# EAGLE board Serial-7-Segment-Shield-Panel-v11 (EAGLE 6.5.0)
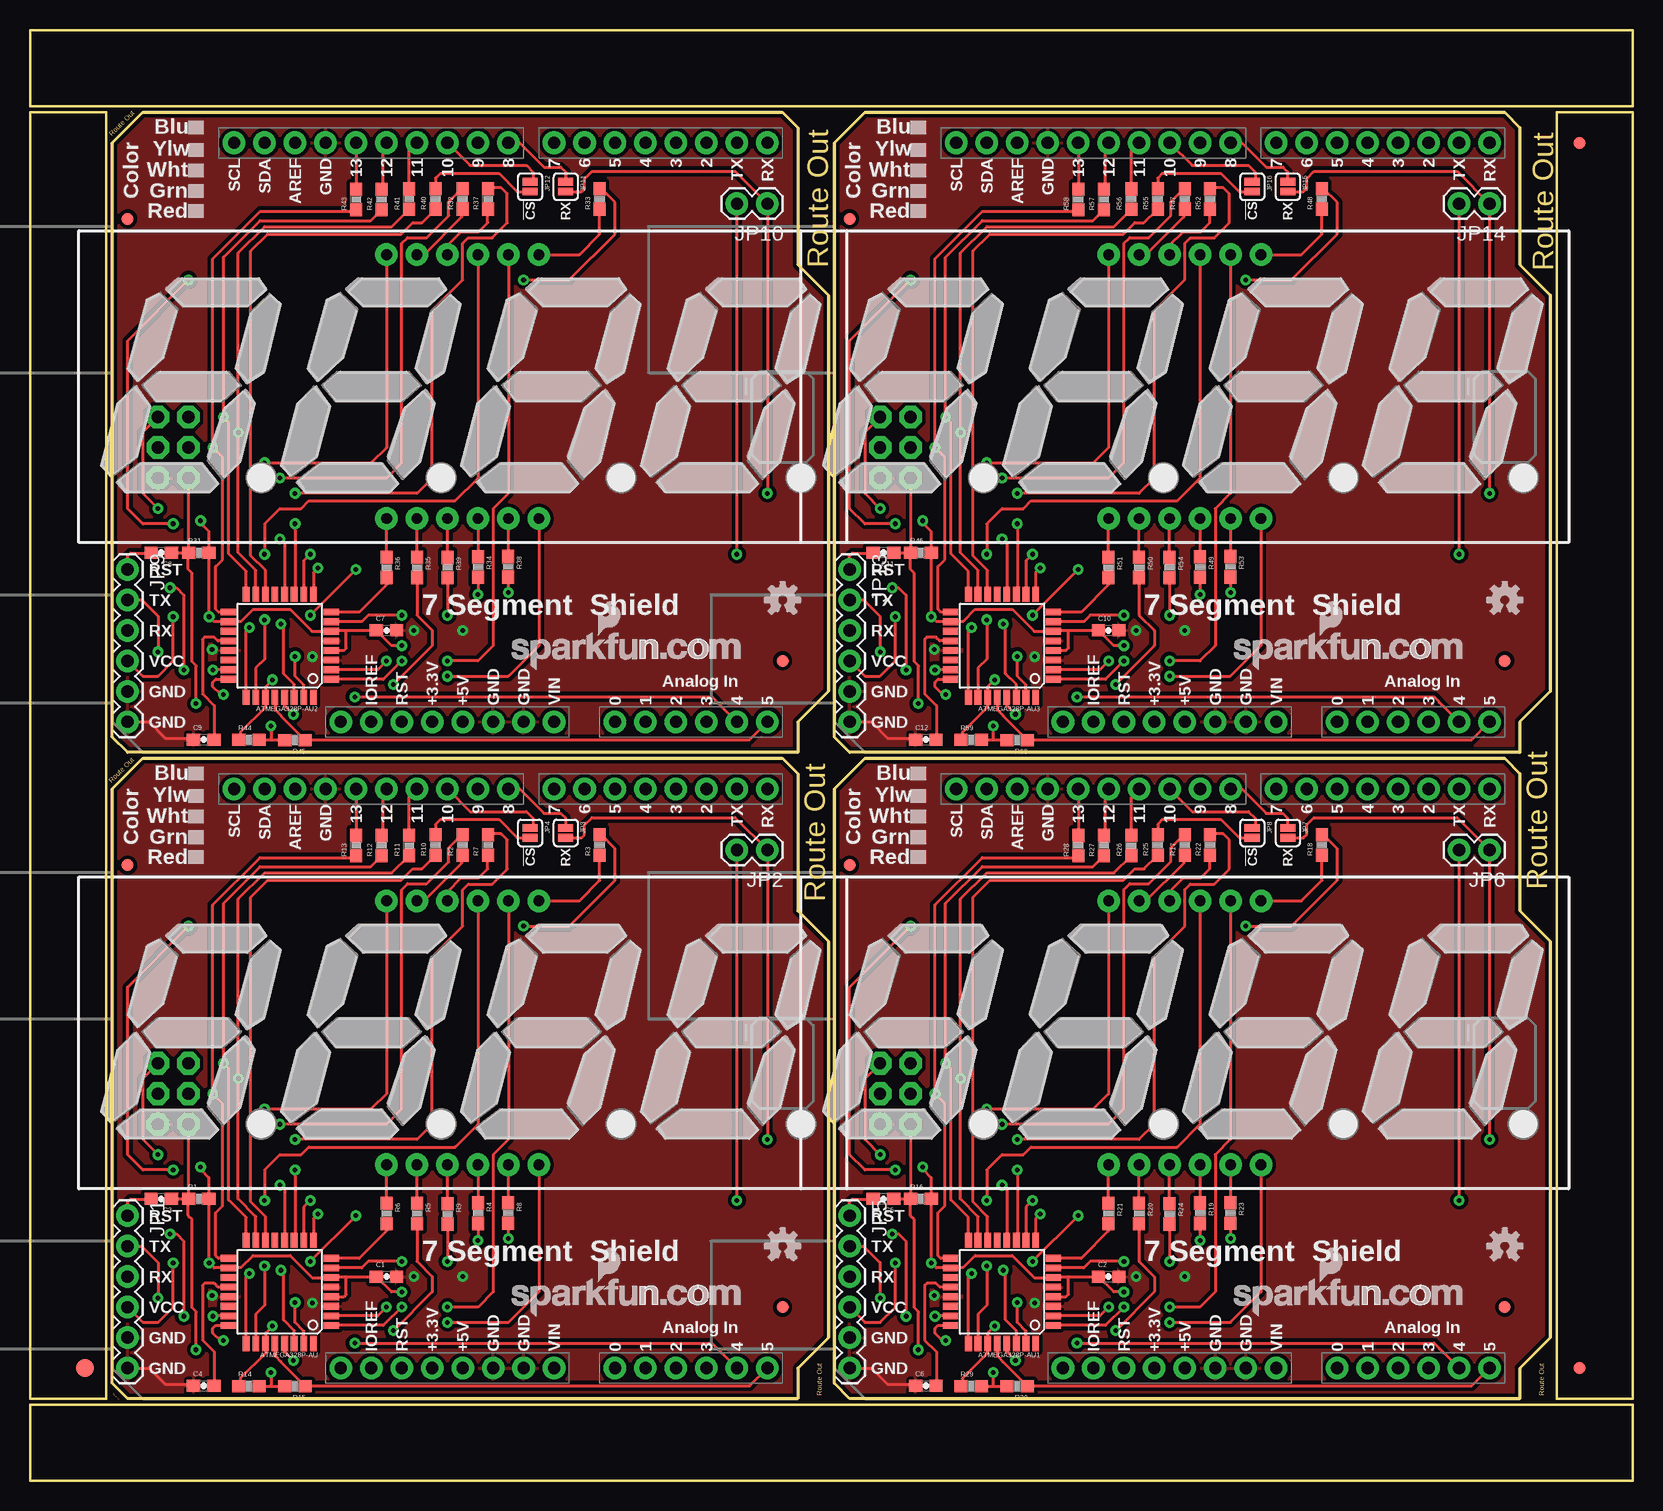
[diagram p0: board, top side]
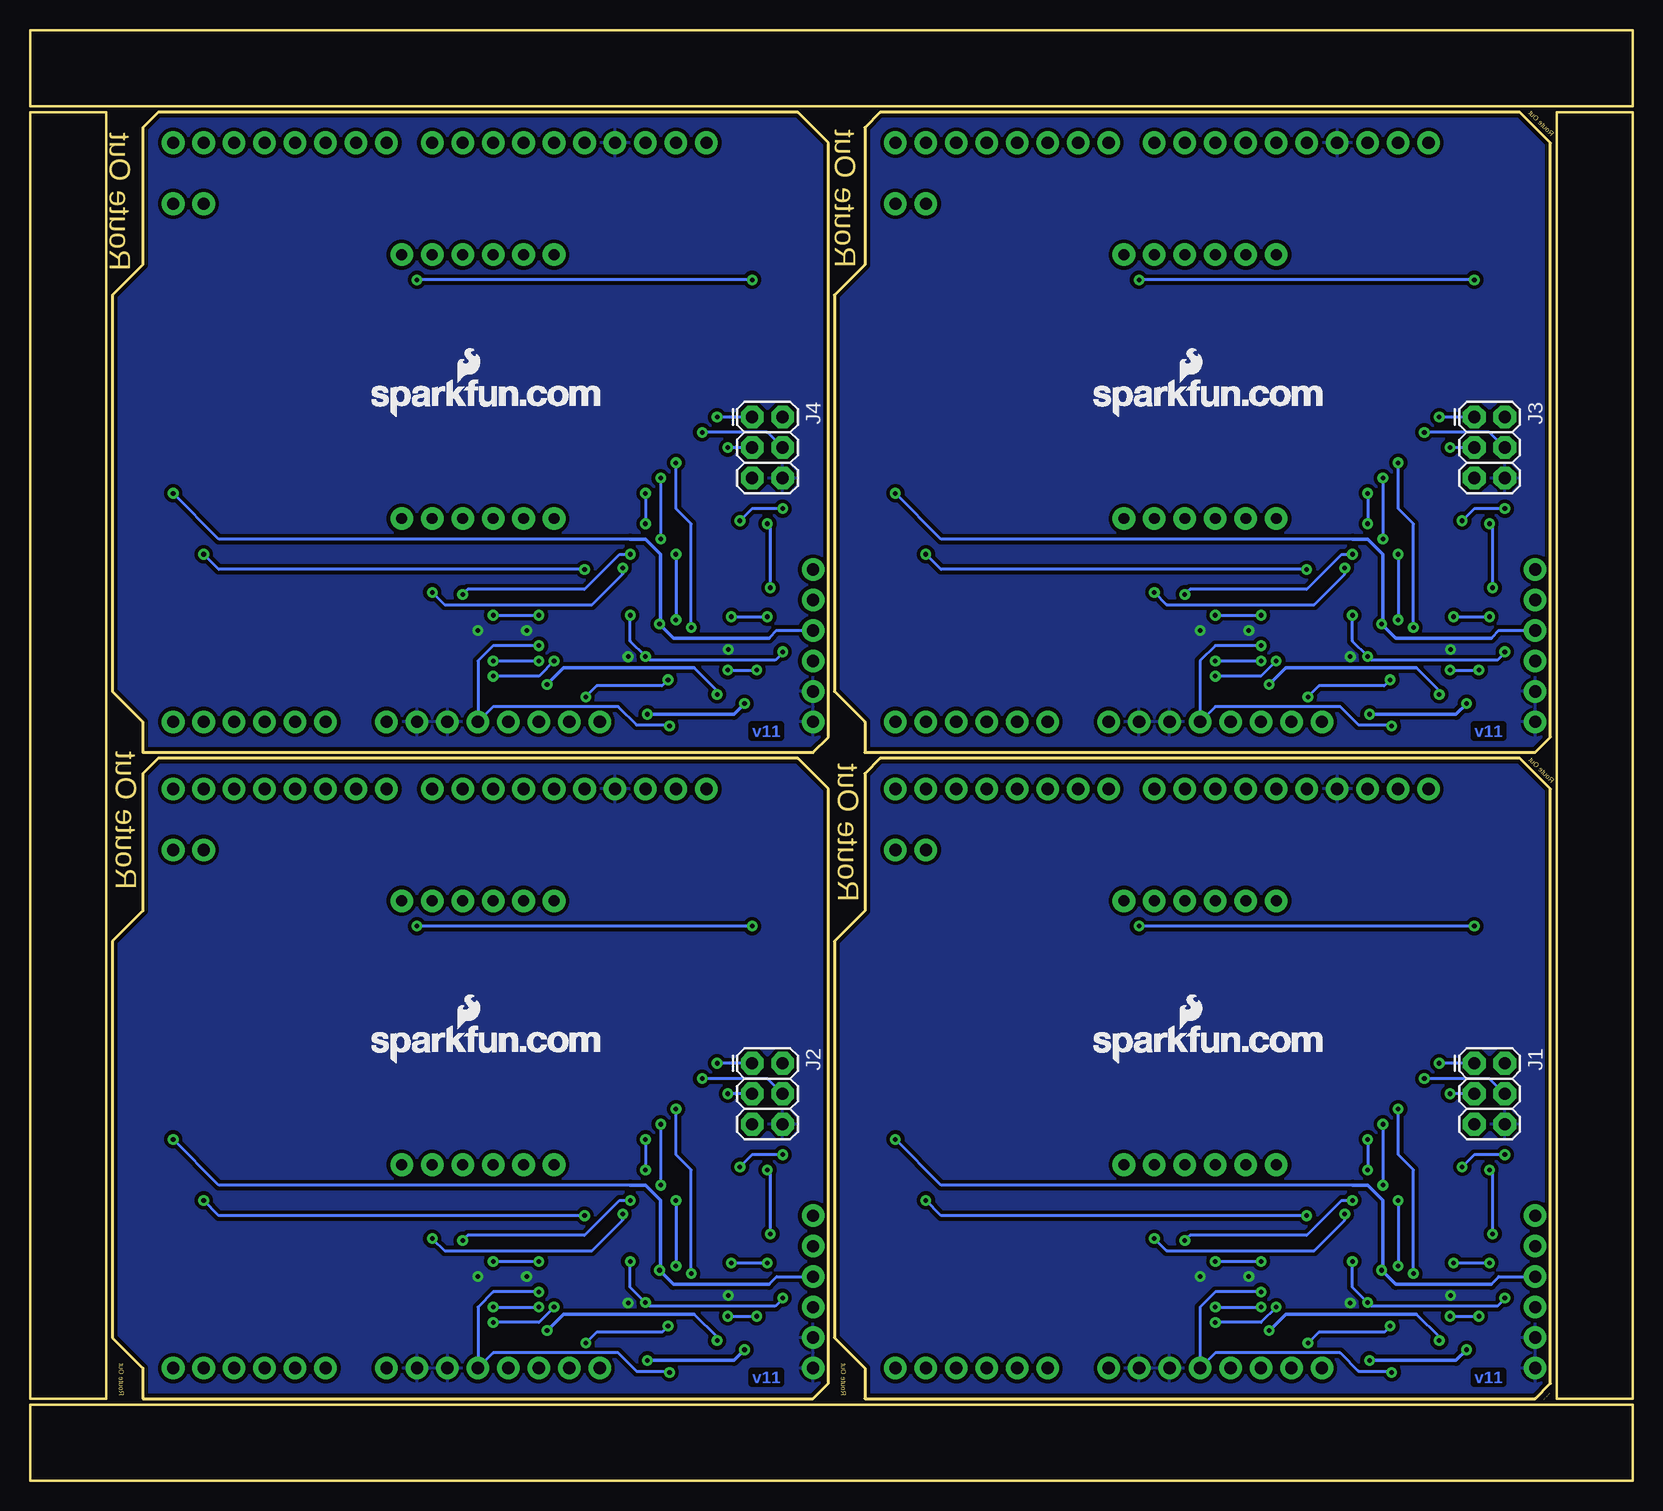
[diagram p1: board, bottom side, seen from below]

Size 133.6 x 120.9 mm. Coordinates in mm from the lower left corner, seen from the top.
Outline: 6.86,8.13 6.86,57.66 9.4,60.2 62.74,60.2 64.01,58.93 64.01,47.5 66.55,44.96 66.55,11.94 64.01,9.4 64.01,6.86 8.13,6.86 6.86,8.13
Outline: 67.06,8.13 67.06,57.66 69.6,60.2 122.94,60.2 124.21,58.93 124.21,47.5 126.75,44.96 126.75,11.94 124.21,9.4 124.21,6.86 68.33,6.86 67.06,8.13
Outline: 6.86,61.98 6.86,111.51 9.4,114.05 62.74,114.05 64.01,112.78 64.01,101.35 66.55,98.81 66.55,65.79 64.01,63.25 64.01,60.71 8.13,60.71 6.86,61.98
Outline: 67.06,61.98 67.06,111.51 69.6,114.05 122.94,114.05 124.21,112.78 124.21,101.35 126.75,98.81 126.75,65.79 124.21,63.25 124.21,60.71 68.33,60.71 67.06,61.98
Outline: 6.35,6.86 6.35,114.05 0,114.05 0,6.86 6.35,6.86
Outline: 0,0 133.6,0 133.6,6.35 0,6.35 0,0
Outline: 133.6,6.86 133.6,114.05 127.25,114.05 127.25,6.86 133.6,6.86
Outline: 133.6,120.9 0,120.9 0,114.55 133.6,114.55 133.6,120.9
Copper layers (1*16): Top 0.035mm / dielectric 1.5mm / Bottom 0.035mm
Design rules "SparkFun-2-layer": minimum track width 7mil, minimum drill 15mil, track to track 8mil, track to pad 8mil, pad to pad 8mil, via to via 8mil, smd to smd 8mil, copper to edge 8mil, drill to drill 8mil, minimum pad ring 12mil, minimum via ring 10mil, stop-mask expansion 4mil, vias tented up to drill 20mil, thermal gap 10mil

## Footprints (pad centres in the part's own frame; a part is rotated, then mirrored left to right if it is on the bottom)
TQFP32-08 = smd 1.27 x 0.559: 1 -4.293,2.8; 2 -4.293,2; 3 -4.293,1.2; 4 -4.293,0.4; 5 -4.293,-0.4; 6 -4.293,-1.2; 7 -4.293,-2; 8 -4.293,-2.8; 17 4.293,-2.8; 18 4.293,-2; 19 4.293,-1.2; 20 4.293,-0.4; 21 4.293,0.4; 22 4.293,1.2; 23 4.293,2; 24 4.293,2.8 | smd 0.559 x 1.27: 9 -2.8,-4.293; 10 -2,-4.293; 11 -1.2,-4.293; 12 -0.4,-4.293; 13 0.4,-4.293; 14 1.2,-4.293; 15 2,-4.293; 16 2.8,-4.293; 25 2.8,4.293; 26 2,4.293; 27 1.2,4.293; 28 0.4,4.293; 29 -0.4,4.293; 30 -1.2,4.293; 31 -2,4.293; 32 -2.8,4.293
0603-CAP = smd 1.1 x 1: 1 -0.85,0; 2 0.85,0
FIDUCIAL-1.5X3 = smd 1.5 x 1.5: 1 0,0
FIDUCIAL-1X2 = smd 1 x 1: 1 0,0
2X3 = drill 1.016 pad 1.88 octagon: 1 0,0; 2 0,2.54; 3 2.54,0; 4 2.54,2.54; 5 5.08,0; 6 5.08,2.54
1X06 = drill 1.016 pad 1.88: 1 0,0; 2 2.54,0; 3 5.08,0; 4 7.62,0; 5 10.16,0; 6 12.7,0
1X02 = drill 1.016 pad 1.88: 1 0,0; 2 2.54,0
SJ_2S = smd 0.635 x 1.27: 1 -0.412,0; 2 0.412,0
0603-RES = smd 1.1 x 1: 1 -0.85,0; 2 0.85,0
UNO_R3_SHIELD = drill 1.016 pad 1.88: 3.3V 50.8,26.67; 5V 50.8,29.21; A0 50.8,41.91; A1 50.8,44.45; A2 50.8,46.99; A3 50.8,49.53; A4 50.8,52.07; A5 50.8,54.61; AREF 2.54,15.24; D2 2.54,49.53; D3 2.54,46.99; D4 2.54,44.45; D5 2.54,41.91; D6 2.54,39.37; D7 2.54,36.83; D8 2.54,33.02; D9 2.54,30.48; D10 2.54,27.94; D11 2.54,25.4; D12 2.54,22.86; D13 2.54,20.32; GND@0 50.8,31.75; GND@1 50.8,34.29; GND@2 2.54,17.78; IOREF 50.8,21.59; NC 50.8,19.05; RES 50.8,24.13; RX 2.54,54.61; SCL 2.54,10.16; SDA 2.54,12.7; TX 2.54,52.07; VIN 50.8,36.83
7-SEGMENT-4DIGIT-COUNTER = drill 0.9 pad 1.88: 1 -6.35,-10.998; 2 -3.81,-10.998; 3 -1.27,-10.998; 4 1.27,-10.998; 5 3.81,-10.998; 6 6.35,-10.998; 7 6.35,10.998; 8 3.81,10.998; 9 1.27,10.998; 10 -1.27,10.998; 11 -3.81,10.998; 12 -6.35,10.998

## Placement (x,y rotation side)
ATMEGA328P-AU  ATMEGA328P-AU  [TQFP32-08]  20.83,15.75 180 top
ATMEGA328P-AU1  ATMEGA328P-AU  [TQFP32-08]  81.03,15.75 180 top
ATMEGA328P-AU2  ATMEGA328P-AU  [TQFP32-08]  20.83,69.6 180 top
ATMEGA328P-AU3  ATMEGA328P-AU  [TQFP32-08]  81.03,69.6 180 top
C1  0.1uF  [0603-CAP]  29.72,17.02 0 top
C2  0.1uF  [0603-CAP]  89.92,17.02 0 top
C3  0.1uF  [0603-CAP]  10.95,23.5 180 top
C4  0.1uF  [0603-CAP]  14.48,7.92 0 top
C5  0.1uF  [0603-CAP]  71.15,23.5 180 top
C6  0.1uF  [0603-CAP]  74.68,7.92 0 top
C7  0.1uF  [0603-CAP]  29.72,70.87 0 top
C8  0.1uF  [0603-CAP]  10.95,77.34 180 top
C9  0.1uF  [0603-CAP]  14.48,61.77 0 top
C10  0.1uF  [0603-CAP]  89.92,70.87 0 top
C11  0.1uF  [0603-CAP]  71.15,77.34 180 top
C12  0.1uF  [0603-CAP]  74.68,61.77 0 top
E$1  [FIDUCIAL-1.5X3]  4.57,9.4 0 top
E$4  [FIDUCIAL-1X2]  129.16,9.4 0 top
E$5  [FIDUCIAL-1X2]  129.16,111.51 180 top
FID1  FIDUCIAL1X2  [FIDUCIAL-1X2]  62.74,14.48 0 top
FID2  FIDUCIAL1X2  [FIDUCIAL-1X2]  8.13,51.31 0 top
FID3  FIDUCIAL1X2  [FIDUCIAL-1X2]  122.94,14.48 0 top
FID4  FIDUCIAL1X2  [FIDUCIAL-1X2]  68.33,51.31 0 top
FID5  FIDUCIAL1X2  [FIDUCIAL-1X2]  62.74,68.33 0 top
FID6  FIDUCIAL1X2  [FIDUCIAL-1X2]  8.13,105.16 0 top
FID7  FIDUCIAL1X2  [FIDUCIAL-1X2]  122.94,68.33 0 top
FID8  FIDUCIAL1X2  [FIDUCIAL-1X2]  68.33,105.16 0 top
J1  AVR_SPI_PRG_6PTH  [2X3]  13.21,34.8 270 bottom
J2  AVR_SPI_PRG_6PTH  [2X3]  73.41,34.8 270 bottom
J3  AVR_SPI_PRG_6PTH  [2X3]  13.21,88.65 270 bottom
J4  AVR_SPI_PRG_6PTH  [2X3]  73.41,88.65 270 bottom
JP1  [1X06]  8.13,22.1 270 top
JP2  [1X02]  61.47,52.58 180 top
JP3  NC  [SJ_2S]  44.65,54 270 top
JP4  NC  [SJ_2S]  41.68,54 270 top
JP5  [1X06]  68.33,22.1 270 top
JP6  [1X02]  121.67,52.58 180 top
JP7  NC  [SJ_2S]  104.85,54 270 top
JP8  NC  [SJ_2S]  101.88,54 270 top
JP9  [1X06]  8.13,75.95 270 top
JP10  [1X02]  61.47,106.43 180 top
JP11  NC  [SJ_2S]  44.65,107.85 270 top
JP12  NC  [SJ_2S]  41.68,107.85 270 top
JP13  [1X06]  68.33,75.95 270 top
JP14  [1X02]  121.67,106.43 180 top
JP15  NC  [SJ_2S]  104.85,107.85 270 top
JP16  NC  [SJ_2S]  101.88,107.85 270 top
LOGO1  LOGO-SFENEW  [SFE-NEW-WEBLOGO]  40.13,13.72 0 top
LOGO2  LOGO-SFENEW  [SFE-NEW-WEBLOGO]  44.96,34.8 0 bottom
LOGO3  LOGO-SFENEW  [SFE-NEW-WEBLOGO]  100.33,13.72 0 top
LOGO4  LOGO-SFENEW  [SFE-NEW-WEBLOGO]  105.16,34.8 0 bottom
LOGO5  LOGO-SFENEW  [SFE-NEW-WEBLOGO]  40.13,67.56 0 top
LOGO6  LOGO-SFENEW  [SFE-NEW-WEBLOGO]  44.96,88.65 0 bottom
LOGO7  LOGO-SFENEW  [SFE-NEW-WEBLOGO]  100.33,67.56 0 top
LOGO8  LOGO-SFENEW  [SFE-NEW-WEBLOGO]  105.16,88.65 0 bottom
R1  10k  [0603-RES]  14.07,23.5 0 top
R2  100  [0603-RES]  36.07,52.98 90 top
R3  100  [0603-RES]  47.5,52.98 90 top
R4  100  [0603-RES]  37.34,22.3 270 top
R5  100  [0603-RES]  32.26,22.28 270 top
R6  100  [0603-RES]  29.72,22.28 270 top
R7  100  [0603-RES]  38.18,52.98 90 top
R8  100  [0603-RES]  39.85,22.33 270 top
R9  100  [0603-RES]  34.8,22.25 270 top
R10  1k  [0603-RES]  33.81,52.98 90 top
R11  1k  [0603-RES]  31.6,52.96 90 top
R12  1k  [0603-RES]  29.31,52.93 90 top
R13  1k  [0603-RES]  27.18,52.93 90 top
R14  10k  [0603-RES]  18.26,7.9 0 top
R15  10k  [0603-RES]  22.1,7.87 180 top
R16  10k  [0603-RES]  74.27,23.5 0 top
R17  100  [0603-RES]  96.27,52.98 90 top
R18  100  [0603-RES]  107.7,52.98 90 top
R19  100  [0603-RES]  97.54,22.3 270 top
R20  100  [0603-RES]  92.46,22.28 270 top
R21  100  [0603-RES]  89.92,22.28 270 top
R22  100  [0603-RES]  98.37,52.98 90 top
R23  100  [0603-RES]  100.05,22.33 270 top
R24  100  [0603-RES]  95,22.25 270 top
R25  1k  [0603-RES]  94.01,52.98 90 top
R26  1k  [0603-RES]  91.8,52.96 90 top
R27  1k  [0603-RES]  89.51,52.93 90 top
R28  1k  [0603-RES]  87.38,52.93 90 top
R29  10k  [0603-RES]  78.46,7.9 0 top
R30  10k  [0603-RES]  82.3,7.87 180 top
R31  10k  [0603-RES]  14.07,77.34 0 top
R32  100  [0603-RES]  36.07,106.83 90 top
R33  100  [0603-RES]  47.5,106.83 90 top
R34  100  [0603-RES]  37.34,76.15 270 top
R35  100  [0603-RES]  32.26,76.12 270 top
R36  100  [0603-RES]  29.72,76.12 270 top
R37  100  [0603-RES]  38.18,106.83 90 top
R38  100  [0603-RES]  39.85,76.17 270 top
R39  100  [0603-RES]  34.8,76.1 270 top
R40  1k  [0603-RES]  33.81,106.83 90 top
R41  1k  [0603-RES]  31.6,106.81 90 top
R42  1k  [0603-RES]  29.31,106.78 90 top
R43  1k  [0603-RES]  27.18,106.78 90 top
R44  10k  [0603-RES]  18.26,61.75 0 top
R45  10k  [0603-RES]  22.1,61.72 180 top
R46  10k  [0603-RES]  74.27,77.34 0 top
R47  100  [0603-RES]  96.27,106.83 90 top
R48  100  [0603-RES]  107.7,106.83 90 top
R49  100  [0603-RES]  97.54,76.15 270 top
R50  100  [0603-RES]  92.46,76.12 270 top
R51  100  [0603-RES]  89.92,76.12 270 top
R52  100  [0603-RES]  98.37,106.83 90 top
R53  100  [0603-RES]  100.05,76.17 270 top
R54  100  [0603-RES]  95,76.1 270 top
R55  1k  [0603-RES]  94.01,106.83 90 top
R56  1k  [0603-RES]  91.8,106.81 90 top
R57  1k  [0603-RES]  89.51,106.78 90 top
R58  1k  [0603-RES]  87.38,106.78 90 top
R59  10k  [0603-RES]  78.46,61.75 0 top
R60  10k  [0603-RES]  82.3,61.72 180 top
U1  ARDUINO_R3_SHIELD  [UNO_R3_SHIELD]  6.86,60.2 270 top
U2  ARDUINO_R3_SHIELD  [UNO_R3_SHIELD]  67.06,60.2 270 top
U3  ARDUINO_R3_SHIELD  [UNO_R3_SHIELD]  6.86,114.05 270 top
U4  ARDUINO_R3_SHIELD  [UNO_R3_SHIELD]  67.06,114.05 270 top
U$1  7-SEGMENT-4DIGIT-COUNTERPTH  [7-SEGMENT-4DIGIT-COUNTER]  36.07,37.34 0 top
U$2  OSHW-LOGOS  [OSHW-LOGO-S]  122.94,19.56 0 top
U$3  7-SEGMENT-4DIGIT-COUNTERPTH  [7-SEGMENT-4DIGIT-COUNTER]  96.27,37.34 0 top
U$4  OSHW-LOGOS  [OSHW-LOGO-S]  62.74,19.56 0 top
U$5  OSHW-LOGOS  [OSHW-LOGO-S]  62.74,73.41 0 top
U$6  7-SEGMENT-4DIGIT-COUNTERPTH  [7-SEGMENT-4DIGIT-COUNTER]  36.07,91.19 0 top
U$7  OSHW-LOGOS  [OSHW-LOGO-S]  122.94,73.41 0 top
U$8  7-SEGMENT-4DIGIT-COUNTERPTH  [7-SEGMENT-4DIGIT-COUNTER]  96.27,91.19 0 top

## Library data of the parts
ATMEGA328P-AU ATMEGA328P-AU1-ATMEGA328P-AU3 C1 C2 C7 C10 R1-R60 = SparkFun
C3-C6 C8 C9 C11 C12 JP3 JP4 JP7 JP8 JP11 JP12 JP15 JP16 = SparkFun-Passives
E$1 = SparkFun-Retired
E$4 E$5 FID1-FID8 LOGO1-LOGO8 U$2 U$4 U$5 U$7 = SparkFun-Aesthetics
J1-J4 JP1 JP2 JP5 JP6 JP9 JP10 JP13 JP14 = SparkFun-Connectors
U1-U4 = SparkFun-Boards
U$1 U$3 U$6 U$8 = SparkFun-Displays

## Nets
!SS: ATMEGA328P-AU.14 R10.1
!SS1: ATMEGA328P-AU1.14 R25.1
!SS2: ATMEGA328P-AU2.14 R40.1
!SS3: ATMEGA328P-AU3.14 R55.1
A: ATMEGA328P-AU.12 R2.2
A1: ATMEGA328P-AU1.12 R17.2
A2: ATMEGA328P-AU2.12 R32.2
A3: ATMEGA328P-AU3.12 R47.2
ADC1: ATMEGA328P-AU1.19
ADC2: ATMEGA328P-AU1.22
ADC3: ATMEGA328P-AU2.19
ADC4: ATMEGA328P-AU2.22
ADC5: ATMEGA328P-AU3.19
ADC6: ATMEGA328P-AU.19
ADC7: ATMEGA328P-AU.22
ADC8: ATMEGA328P-AU3.22
B: ATMEGA328P-AU.23 R3.2
B1: ATMEGA328P-AU1.23 R18.2
B2: ATMEGA328P-AU2.23 R33.2
B3: ATMEGA328P-AU3.23 R48.2
C: ATMEGA328P-AU.10 R4.2
C1: ATMEGA328P-AU1.10 R19.2
C2: ATMEGA328P-AU2.10 R34.2
C3: ATMEGA328P-AU3.10 R49.2
D: ATMEGA328P-AU.24 R5.2
D1: ATMEGA328P-AU1.24 R20.2
D2: ATMEGA328P-AU2.24 R35.2
D3: ATMEGA328P-AU3.24 R50.2
DIG1: ATMEGA328P-AU.25 U$1.12
DIG2: ATMEGA328P-AU.26 U$1.9
DIG3: ATMEGA328P-AU.1 U$1.8
DIG4: ATMEGA328P-AU.2 U$1.6
DIG5: ATMEGA328P-AU1.2 U$3.6
DIG6: ATMEGA328P-AU1.1 U$3.8
DIG7: ATMEGA328P-AU1.26 U$3.9
DIG8: ATMEGA328P-AU1.25 U$3.12
DIG9: ATMEGA328P-AU2.2 U$6.6
DIG10: ATMEGA328P-AU2.1 U$6.8
DIG11: ATMEGA328P-AU2.26 U$6.9
DIG12: ATMEGA328P-AU2.25 U$6.12
DIG13: ATMEGA328P-AU3.2 U$8.6
DIG14: ATMEGA328P-AU3.1 U$8.8
DIG15: ATMEGA328P-AU3.26 U$8.9
DIG16: ATMEGA328P-AU3.25 U$8.12
DP: ATMEGA328P-AU.7 R9.2
DP1: ATMEGA328P-AU1.7 R24.2
DP2: ATMEGA328P-AU2.7 R39.2
DP3: ATMEGA328P-AU3.7 R54.2
E: ATMEGA328P-AU.8 R6.2
E1: ATMEGA328P-AU1.8 R21.2
E2: ATMEGA328P-AU2.8 R36.2
E3: ATMEGA328P-AU3.8 R51.2
F: ATMEGA328P-AU.11 R7.2
F1: ATMEGA328P-AU1.11 R22.2
F2: ATMEGA328P-AU2.11 R37.2
F3: ATMEGA328P-AU3.11 R52.2
G: ATMEGA328P-AU.9 R8.2
G1: ATMEGA328P-AU1.9 R23.2
G2: ATMEGA328P-AU2.9 R38.2
G3: ATMEGA328P-AU3.9 R53.2
GND: ATMEGA328P-AU.3 ATMEGA328P-AU.5 ATMEGA328P-AU.21 C1.2 C4.1 J1.6 JP1.5 JP1.6 U1.GND@0 U1.GND@1 U1.GND@2
GND1: ATMEGA328P-AU1.3 ATMEGA328P-AU1.5 ATMEGA328P-AU1.21 C2.2 C6.1 J2.6 JP5.5 JP5.6 U2.GND@0 U2.GND@1 U2.GND@2
GND2: ATMEGA328P-AU2.3 ATMEGA328P-AU2.5 ATMEGA328P-AU2.21 C7.2 C9.1 J3.6 JP9.5 JP9.6 U3.GND@0 U3.GND@1 U3.GND@2
GND3: ATMEGA328P-AU3.3 ATMEGA328P-AU3.5 ATMEGA328P-AU3.21 C10.2 C12.1 J4.6 JP13.5 JP13.6 U4.GND@0 U4.GND@1 U4.GND@2
MISO: ATMEGA328P-AU.16 J1.1 R12.1
MISO1: ATMEGA328P-AU1.16 J2.1 R27.1
MISO2: ATMEGA328P-AU2.16 J3.1 R42.1
MISO3: ATMEGA328P-AU3.16 J4.1 R57.1
MOSI: ATMEGA328P-AU.15 J1.4 R11.1
MOSI1: ATMEGA328P-AU1.15 J2.4 R26.1
MOSI2: ATMEGA328P-AU2.15 J3.4 R41.1
MOSI3: ATMEGA328P-AU3.15 J4.4 R56.1
N$1: ATMEGA328P-AU.20 C4.2
N$2: R13.2 U1.D13
N$3: R12.2 U1.D12
N$4: R11.2 U1.D11
N$5: JP4.2 R10.2
N$6: JP4.1 U1.D10
N$7: JP3.1 U1.D8
N$8: C5.2 JP5.1
N$9: ATMEGA328P-AU1.20 C6.2
N$10: R17.1 U$3.11
N$11: R2.1 U$1.11
N$12: R3.1 U$1.7
N$13: C3.2 JP1.1
N$14: R4.1 U$1.4
N$15: R5.1 U$1.2
N$16: R6.1 U$1.1
N$17: R7.1 U$1.10
N$18: R8.1 U$1.5
N$19: R9.1 U$1.3
N$20: R18.1 U$3.7
N$21: R19.1 U$3.4
N$22: R20.1 U$3.2
N$23: R21.1 U$3.1
N$24: R22.1 U$3.10
N$25: R23.1 U$3.5
N$26: R24.1 U$3.3
N$27: R28.2 U2.D13
N$28: R27.2 U2.D12
N$29: R26.2 U2.D11
N$30: JP8.2 R25.2
N$31: JP8.1 U2.D10
N$32: JP7.1 U2.D8
N$33: C8.2 JP9.1
N$34: ATMEGA328P-AU2.20 C9.2
N$35: R32.1 U$6.11
N$36: R33.1 U$6.7
N$37: R34.1 U$6.4
N$38: R35.1 U$6.2
N$39: R36.1 U$6.1
N$40: R37.1 U$6.10
N$41: R38.1 U$6.5
N$42: R39.1 U$6.3
N$43: R43.2 U3.D13
N$44: R42.2 U3.D12
N$45: R41.2 U3.D11
N$46: JP12.2 R40.2
N$47: JP12.1 U3.D10
N$48: JP11.1 U3.D8
N$49: C11.2 JP13.1
N$50: ATMEGA328P-AU3.20 C12.2
N$51: R47.1 U$8.11
N$52: R48.1 U$8.7
N$53: R49.1 U$8.4
N$54: R50.1 U$8.2
N$55: R51.1 U$8.1
N$56: R52.1 U$8.10
N$57: R53.1 U$8.5
N$58: R54.1 U$8.3
N$59: R58.2 U4.D13
N$60: R57.2 U4.D12
N$61: R56.2 U4.D11
N$62: JP16.2 R55.2
N$63: JP16.1 U4.D10
N$64: JP15.1 U4.D8
RESET: ATMEGA328P-AU.29 C3.1 J1.5 R1.1
RESET1: ATMEGA328P-AU1.29 C5.1 J2.5 R16.1
RESET2: ATMEGA328P-AU2.29 C8.1 J3.5 R31.1
RESET3: ATMEGA328P-AU3.29 C11.1 J4.5 R46.1
RX: ATMEGA328P-AU.30 JP1.3 JP2.1 JP3.2
RX1: ATMEGA328P-AU1.30 JP5.3 JP6.1 JP7.2
RX2: ATMEGA328P-AU2.30 JP9.3 JP10.1 JP11.2
RX3: ATMEGA328P-AU3.30 JP13.3 JP14.1 JP15.2
SCK: ATMEGA328P-AU.17 J1.3 R13.1
SCK1: ATMEGA328P-AU1.17 J2.3 R28.1
SCK2: ATMEGA328P-AU2.17 J3.3 R43.1
SCK3: ATMEGA328P-AU3.17 J4.3 R58.1
SCL: ATMEGA328P-AU.28 R15.1 U1.A5
SCL1: ATMEGA328P-AU1.28 R30.1 U2.A5
SCL2: ATMEGA328P-AU2.28 R45.1 U3.A5
SCL3: ATMEGA328P-AU3.28 R60.1 U4.A5
SDA: ATMEGA328P-AU.27 R14.1 U1.A4
SDA1: ATMEGA328P-AU1.27 R29.1 U2.A4
SDA2: ATMEGA328P-AU2.27 R44.1 U3.A4
SDA3: ATMEGA328P-AU3.27 R59.1 U4.A4
TX: ATMEGA328P-AU.31 JP1.2 JP2.2
TX1: ATMEGA328P-AU1.31 JP5.2 JP6.2
TX2: ATMEGA328P-AU2.31 JP9.2 JP10.2
TX3: ATMEGA328P-AU3.31 JP13.2 JP14.2
VCC: ATMEGA328P-AU.4 ATMEGA328P-AU.6 ATMEGA328P-AU.18 C1.1 J1.2 JP1.4 R1.2 R14.2 R15.2 U1.5V
VCC1: ATMEGA328P-AU1.4 ATMEGA328P-AU1.6 ATMEGA328P-AU1.18 C2.1 J2.2 JP5.4 R16.2 R29.2 R30.2 U2.5V
VCC2: ATMEGA328P-AU2.4 ATMEGA328P-AU2.6 ATMEGA328P-AU2.18 C7.1 J3.2 JP9.4 R31.2 R44.2 R45.2 U3.5V
VCC3: ATMEGA328P-AU3.4 ATMEGA328P-AU3.6 ATMEGA328P-AU3.18 C10.1 J4.2 JP13.4 R46.2 R59.2 R60.2 U4.5V

## Tracks (layer width: path | path; a pad name or v marks a point on that pad's centre or on a via)
!SS
  Top 0.254: ATMEGA328P-AU.14 19.63,22.03 18.41,23.24 18.41,48.64 19.81,50.04 30.94,50.04 31.9,51 32.68,51 R10.1
!SS1
  Top 0.254: ATMEGA328P-AU1.14 79.83,22.03 78.61,23.24 78.61,48.64 80.01,50.04 91.14,50.04 92.1,51 92.87,51 R25.1
!SS2
  Top 0.254: ATMEGA328P-AU2.14 19.63,75.88 18.41,77.09 18.41,102.49 19.81,103.89 30.94,103.89 31.9,104.85 32.68,104.85 R40.1
!SS3
  Top 0.254: ATMEGA328P-AU3.14 79.83,75.88 78.61,77.09 78.61,102.49 80.01,103.89 91.14,103.89 92.1,104.85 92.87,104.85 R55.1
A  (via drill 0.38)
  Top 0.254: v20.83,29.72 29.72,29.72 30.99,30.99 30.99,49.28 31.47,49.76 33.07,49.76 34.9,51.59 34.9,52.74 35.99,53.83 R2.2 | v20.83,24.64 21.23,24.24 ATMEGA328P-AU.12
  Bottom 0.254: v20.83,29.72 v20.83,24.64
A1  (via drill 0.38)
  Top 0.254: v81.03,29.72 89.92,29.72 91.19,30.99 91.19,49.28 91.67,49.76 93.27,49.76 95.1,51.59 95.1,52.74 96.19,53.83 R17.2 | v81.03,24.64 81.43,24.24 ATMEGA328P-AU1.12
  Bottom 0.254: v81.03,29.72 v81.03,24.64
A2  (via drill 0.38)
  Top 0.254: v20.83,83.57 29.72,83.57 30.99,84.84 30.99,103.12 31.47,103.61 33.07,103.61 34.9,105.44 34.9,106.59 35.99,107.68 R32.2 | v20.83,78.49 21.23,78.09 ATMEGA328P-AU2.12
  Bottom 0.254: v20.83,83.57 v20.83,78.49
A3  (via drill 0.38)
  Top 0.254: v81.03,83.57 89.92,83.57 91.19,84.84 91.19,103.12 91.67,103.61 93.27,103.61 95.1,105.44 95.1,106.59 96.19,107.68 R47.2 | v81.03,78.49 81.43,78.09 ATMEGA328P-AU3.12
  Bottom 0.254: v81.03,83.57 v81.03,78.49
B  (via drill 0.38)
  Top 0.254: ATMEGA328P-AU.23 15.27,13.75 v15.24,13.72 | v11.94,25.91 9.4,25.91 8.13,27.18 8.13,41.15 v13.21,46.23 | v11.68,20.57 12.22,20.57 12.83,19.96 v12.83,13.72 | v41.15,46.23 44.96,46.23 48.77,50.04 48.77,52.69 47.62,53.83 R3.2
  Bottom 0.254: v15.24,13.72 v12.83,13.72 | v11.68,20.57 11.68,25.65 v11.94,25.91 | v13.21,46.23 v41.15,46.23
B1  (via drill 0.38)
  Top 0.254: ATMEGA328P-AU1.23 75.47,13.75 v75.44,13.72 | v72.14,25.91 69.6,25.91 68.33,27.18 68.33,41.15 v73.41,46.23 | v71.88,20.57 72.42,20.57 73.03,19.96 v73.03,13.72 | v101.35,46.23 105.16,46.23 108.97,50.04 108.97,52.69 107.82,53.83 R18.2
  Bottom 0.254: v75.44,13.72 v73.03,13.72 | v71.88,20.57 71.88,25.65 v72.14,25.91 | v73.41,46.23 v101.35,46.23
B2  (via drill 0.38)
  Top 0.254: ATMEGA328P-AU2.23 15.27,67.6 v15.24,67.56 | v11.94,79.76 9.4,79.76 8.13,81.03 8.13,95 v13.21,100.08 | v11.68,74.42 12.22,74.42 12.83,73.81 v12.83,67.56 | v41.15,100.08 44.96,100.08 48.77,103.89 48.77,106.54 47.62,107.68 R33.2
  Bottom 0.254: v15.24,67.56 v12.83,67.56 | v11.68,74.42 11.68,79.5 v11.94,79.76 | v13.21,100.08 v41.15,100.08
B3  (via drill 0.38)
  Top 0.254: ATMEGA328P-AU3.23 75.47,67.6 v75.44,67.56 | v72.14,79.76 69.6,79.76 68.33,81.03 68.33,95 v73.41,100.08 | v71.88,74.42 72.42,74.42 73.03,73.81 v73.03,67.56 | v101.35,100.08 105.16,100.08 108.97,103.89 108.97,106.54 107.82,107.68 R48.2
  Bottom 0.254: v75.44,67.56 v73.03,67.56 | v71.88,74.42 71.88,79.5 v72.14,79.76 | v73.41,100.08 v101.35,100.08
C  (via drill 0.38)
  Top 0.254: R4.2 v37.34,20.02 | v23.37,23.37 22.83,22.83 ATMEGA328P-AU.10
  Bottom 0.254: v23.37,23.37 24.26,23.37 27.18,20.45 36.91,20.45 v37.34,20.02
C1  (via drill 0.38)
  Top 0.254: R19.2 v97.54,20.02 | v83.57,23.37 83.03,22.83 ATMEGA328P-AU1.10
  Bottom 0.254: v83.57,23.37 84.45,23.37 87.38,20.45 97.1,20.45 v97.54,20.02
C2  (via drill 0.38)
  Top 0.254: R34.2 v37.34,73.86 | v23.37,77.22 22.83,76.68 ATMEGA328P-AU2.10
  Bottom 0.254: v23.37,77.22 24.26,77.22 27.18,74.3 36.91,74.3 v37.34,73.86
C3  (via drill 0.38)
  Top 0.254: R49.2 v97.54,73.86 | v83.57,77.22 83.03,76.68 ATMEGA328P-AU3.10
  Bottom 0.254: v83.57,77.22 84.45,77.22 87.38,74.3 97.1,74.3 v97.54,73.86
D  (via drill 0.38)
  Top 0.254: v30.3,12.52 33.53,15.75 33.53,17.02 32.26,18.29 R5.2 | v16.13,11.68 15.88,11.68 15.24,12.32 15.24,12.7 15.49,12.95 ATMEGA328P-AU.24
  Bottom 0.254: 18.03,13.89 16.13,11.99 v16.13,11.68
  Bottom 0.305: 18.03,13.89 28.93,13.89 v30.3,12.52
D1  (via drill 0.38)
  Top 0.254: v90.5,12.52 93.73,15.75 93.73,17.02 92.46,18.29 R20.2 | v76.33,11.68 76.07,11.68 75.44,12.32 75.44,12.7 75.69,12.95 ATMEGA328P-AU1.24
  Bottom 0.254: 78.23,13.89 76.33,11.99 v76.33,11.68
  Bottom 0.305: 78.23,13.89 89.13,13.89 v90.5,12.52
D2  (via drill 0.38)
  Top 0.254: v30.3,66.37 33.53,69.6 33.53,70.87 32.26,72.14 R35.2 | v16.13,65.53 15.88,65.53 15.24,66.17 15.24,66.55 15.49,66.8 ATMEGA328P-AU2.24
  Bottom 0.254: 18.03,67.74 16.13,65.84 v16.13,65.53
  Bottom 0.305: 18.03,67.74 28.93,67.74 v30.3,66.37
D3  (via drill 0.38)
  Top 0.254: v90.5,66.37 93.73,69.6 93.73,70.87 92.46,72.14 R50.2 | v76.33,65.53 76.07,65.53 75.44,66.17 75.44,66.55 75.69,66.8 ATMEGA328P-AU3.24
  Bottom 0.254: 78.23,67.74 76.33,65.84 v76.33,65.53
  Bottom 0.305: 78.23,67.74 89.13,67.74 v90.5,66.37
DIG1  (via drill 0.38)
  Top 0.254: U$1.12 29.72,32.26 28.45,30.99 v19.56,30.99 | ATMEGA328P-AU.25 18.03,17.01 v18.29,17.27
  Bottom 0.254: v18.29,17.27 18.29,25.91 19.56,27.18 v19.56,30.99
DIG2  (via drill 0.38)
  Top 0.254: U$1.9 37.34,29.72 35.43,27.81 23.24,27.81 22.61,27.18 20.83,27.18 19.56,25.91 v19.56,23.37 | v19.56,17.91 19.56,14.63 18.83,13.9 ATMEGA328P-AU.26
  Bottom 0.254: v19.56,23.37 v19.56,17.91
DIG3  (via drill 0.38)
  Top 0.254: U$1.8 39.88,28.45 38.61,27.18 38.61,15.75 37.34,14.48 v34.8,14.48 | v30.99,14.48 29.46,12.95 ATMEGA328P-AU.1
  Bottom 0.254: v34.8,14.48 v30.99,14.48
DIG4  (via drill 0.38)
  Top 0.254: U$1.6 42.42,15.75 39.88,13.21 v34.8,13.21 | v29.72,14.48 28.99,13.75 ATMEGA328P-AU.2
  Bottom 0.254: v29.72,14.48 30.99,13.21 v34.8,13.21
DIG5  (via drill 0.38)
  Top 0.254: U$3.6 102.62,15.75 100.08,13.21 v95,13.21 | v89.92,14.48 89.19,13.75 ATMEGA328P-AU1.2
  Bottom 0.254: v89.92,14.48 91.19,13.21 v95,13.21
DIG6  (via drill 0.38)
  Top 0.254: U$3.8 100.08,28.45 98.81,27.18 98.81,15.75 97.54,14.48 v95,14.48 | v91.19,14.48 89.66,12.95 ATMEGA328P-AU1.1
  Bottom 0.254: v95,14.48 v91.19,14.48
DIG7  (via drill 0.38)
  Top 0.254: U$3.9 97.54,29.72 95.63,27.81 83.44,27.81 82.8,27.18 81.03,27.18 79.76,25.91 v79.76,23.37 | v79.76,17.91 79.76,14.63 79.03,13.9 ATMEGA328P-AU1.26
  Bottom 0.254: v79.76,23.37 v79.76,17.91
DIG8  (via drill 0.38)
  Top 0.254: U$3.12 89.92,32.26 88.65,30.99 v79.76,30.99 | ATMEGA328P-AU1.25 78.23,17.01 v78.49,17.27
  Bottom 0.254: v78.49,17.27 78.49,25.91 79.76,27.18 v79.76,30.99
DIG9  (via drill 0.38)
  Top 0.254: U$6.6 42.42,69.6 39.88,67.06 v34.8,67.06 | v29.72,68.33 28.99,67.6 ATMEGA328P-AU2.2
  Bottom 0.254: v29.72,68.33 30.99,67.06 v34.8,67.06
DIG10  (via drill 0.38)
  Top 0.254: U$6.8 39.88,82.3 38.61,81.03 38.61,69.6 37.34,68.33 v34.8,68.33 | v30.99,68.33 29.46,66.8 ATMEGA328P-AU2.1
  Bottom 0.254: v34.8,68.33 v30.99,68.33
DIG11  (via drill 0.38)
  Top 0.254: U$6.9 37.34,83.57 35.43,81.66 23.24,81.66 22.61,81.03 20.83,81.03 19.56,79.76 v19.56,77.22 | v19.56,71.75 19.56,68.48 18.83,67.75 ATMEGA328P-AU2.26
  Bottom 0.254: v19.56,77.22 v19.56,71.75
DIG12  (via drill 0.38)
  Top 0.254: U$6.12 29.72,86.11 28.45,84.84 v19.56,84.84 | ATMEGA328P-AU2.25 18.03,70.86 v18.29,71.12
  Bottom 0.254: v18.29,71.12 18.29,79.76 19.56,81.03 v19.56,84.84
DIG13  (via drill 0.38)
  Top 0.254: U$8.6 102.62,69.6 100.08,67.06 v95,67.06 | v89.92,68.33 89.19,67.6 ATMEGA328P-AU3.2
  Bottom 0.254: v89.92,68.33 91.19,67.06 v95,67.06
DIG14  (via drill 0.38)
  Top 0.254: U$8.8 100.08,82.3 98.81,81.03 98.81,69.6 97.54,68.33 v95,68.33 | v91.19,68.33 89.66,66.8 ATMEGA328P-AU3.1
  Bottom 0.254: v95,68.33 v91.19,68.33
DIG15  (via drill 0.38)
  Top 0.254: U$8.9 97.54,83.57 95.63,81.66 83.44,81.66 82.8,81.03 81.03,81.03 79.76,79.76 v79.76,77.22 | v79.76,71.75 79.76,68.48 79.03,67.75 ATMEGA328P-AU3.26
  Bottom 0.254: v79.76,77.22 v79.76,71.75
DIG16  (via drill 0.38)
  Top 0.254: U$8.12 89.92,86.11 88.65,84.84 v79.76,84.84 | ATMEGA328P-AU3.25 78.23,70.86 v78.49,71.12
  Bottom 0.254: v78.49,71.12 78.49,79.76 79.76,81.03 v79.76,84.84
DP  (via drill 0.38)
  Top 0.254: R9.2 v34.8,18.29 | v30.99,18.29 28.19,18.29 27.65,17.75 ATMEGA328P-AU.7
  Bottom 0.254: v34.8,18.29 v30.99,18.29
DP1  (via drill 0.38)
  Top 0.254: R24.2 v95,18.29 | v91.19,18.29 88.39,18.29 87.85,17.75 ATMEGA328P-AU1.7
  Bottom 0.254: v95,18.29 v91.19,18.29
DP2  (via drill 0.38)
  Top 0.254: R39.2 v34.8,72.14 | v30.99,72.14 28.19,72.14 27.65,71.6 ATMEGA328P-AU2.7
  Bottom 0.254: v34.8,72.14 v30.99,72.14
DP3  (via drill 0.38)
  Top 0.254: R54.2 v95,72.14 | v91.19,72.14 88.39,72.14 87.85,71.6 ATMEGA328P-AU3.7
  Bottom 0.254: v95,72.14 v91.19,72.14
E
  Top 0.254: R6.2 29.72,20.83 27.44,18.55 ATMEGA328P-AU.8
E1
  Top 0.254: R21.2 89.92,20.83 87.64,18.55 ATMEGA328P-AU1.8
E2
  Top 0.254: R36.2 29.72,74.68 27.44,72.4 ATMEGA328P-AU2.8
E3
  Top 0.254: R51.2 89.92,74.68 87.64,72.4 ATMEGA328P-AU3.8
F  (via drill 0.38)
  Top 0.254: v22.1,28.45 32.26,28.45 33.53,29.72 33.53,43.69 36.07,46.23 36.07,49.28 36.52,49.73 38.53,49.73 39.78,50.98 39.78,53.42 39.27,53.92 38.27,53.92 R7.2 | v22.1,25.91 22.1,20.11 ATMEGA328P-AU.11
  Bottom 0.254: v22.1,28.45 v22.1,25.91
F1  (via drill 0.38)
  Top 0.254: v82.3,28.45 92.46,28.45 93.73,29.72 93.73,43.69 96.27,46.23 96.27,49.28 96.72,49.73 98.73,49.73 99.97,50.98 99.97,53.42 99.47,53.92 98.46,53.92 R22.2 | v82.3,25.91 82.3,20.11 ATMEGA328P-AU1.11
  Bottom 0.254: v82.3,28.45 v82.3,25.91
F2  (via drill 0.38)
  Top 0.254: v22.1,82.3 32.26,82.3 33.53,83.57 33.53,97.54 36.07,100.08 36.07,103.12 36.52,103.58 38.53,103.58 39.78,104.83 39.78,107.26 39.27,107.77 38.27,107.77 R37.2 | v22.1,79.76 22.1,73.96 ATMEGA328P-AU2.11
  Bottom 0.254: v22.1,82.3 v22.1,79.76
F3  (via drill 0.38)
  Top 0.254: v82.3,82.3 92.46,82.3 93.73,83.57 93.73,97.54 96.27,100.08 96.27,103.12 96.72,103.58 98.73,103.58 99.97,104.83 99.97,107.26 99.47,107.77 98.46,107.77 R52.2 | v82.3,79.76 82.3,73.96 ATMEGA328P-AU3.11
  Bottom 0.254: v82.3,82.3 v82.3,79.76
G  (via drill 0.38)
  Top 0.254: v24,22.23 23.63,21.85 ATMEGA328P-AU.9 | R8.2 39.85,20.22 v39.88,20.19
  Bottom 0.254: v24,22.23 24,21.72 26.54,19.18 38.86,19.18 v39.88,20.19
G1  (via drill 0.38)
  Top 0.254: v84.2,22.23 83.83,21.85 ATMEGA328P-AU1.9 | R23.2 100.05,20.22 v100.08,20.19
  Bottom 0.254: v84.2,22.23 84.2,21.72 86.74,19.18 99.06,19.18 v100.08,20.19
G2  (via drill 0.38)
  Top 0.254: v24,76.07 23.63,75.7 ATMEGA328P-AU2.9 | R38.2 39.85,74.07 v39.88,74.04
  Bottom 0.254: v24,76.07 24,75.56 26.54,73.03 38.86,73.03 v39.88,74.04
G3  (via drill 0.38)
  Top 0.254: v84.2,76.07 83.83,75.7 ATMEGA328P-AU3.9 | R53.2 100.05,74.07 v100.08,74.04
  Bottom 0.254: v84.2,76.07 84.2,75.56 86.74,73.03 99.06,73.03 v100.08,74.04
GND  (via drill 0.38, 0.38 pad 0.76)
  Top 0.254: JP1.6 9.93,9.4 11.28,8.05 13.5,8.05 C4.1
  other vias: 32,17.02 23.55,14.83 15.19,15.44 36.07,17.02
  pour Top (isolate 0.305): 6.86,8.13 6.86,57.66 9.4,60.2 62.74,60.2 64.01,58.93 64.01,47.5 66.55,44.96 66.55,11.94 64.01,9.4 64.01,6.86 8.13,6.86
  pour Bottom (isolate 0.305): 6.86,8.13 6.86,57.66 9.4,60.2 62.74,60.2 64.01,58.93 64.01,47.5 66.55,44.96 66.55,11.94 64.01,9.4 64.01,6.86 8.13,6.86
GND1  (via drill 0.38, 0.38 pad 0.76)
  Top 0.254: JP5.6 70.13,9.4 71.48,8.05 73.7,8.05 C6.1
  other vias: 92.2,17.02 83.74,14.83 75.39,15.44 96.27,17.02
  pour Top (isolate 0.305): 67.06,8.13 67.06,57.66 69.6,60.2 122.94,60.2 124.21,58.93 124.21,47.5 126.75,44.96 126.75,11.94 124.21,9.4 124.21,6.86 68.33,6.86
  pour Bottom (isolate 0.305): 67.06,8.13 67.06,57.66 69.6,60.2 122.94,60.2 124.21,58.93 124.21,47.5 126.75,44.96 126.75,11.94 124.21,9.4 124.21,6.86 68.33,6.86
GND2  (via drill 0.38, 0.38 pad 0.76)
  Top 0.254: JP9.6 9.93,63.25 11.28,61.9 13.5,61.9 C9.1
  other vias: 32,70.87 23.55,68.68 15.19,69.29 36.07,70.87
  pour Top (isolate 0.305): 6.86,61.98 6.86,111.51 9.4,114.05 62.74,114.05 64.01,112.78 64.01,101.35 66.55,98.81 66.55,65.79 64.01,63.25 64.01,60.71 8.13,60.71
  pour Bottom (isolate 0.305): 6.86,61.98 6.86,111.51 9.4,114.05 62.74,114.05 64.01,112.78 64.01,101.35 66.55,98.81 66.55,65.79 64.01,63.25 64.01,60.71 8.13,60.71
GND3  (via drill 0.38, 0.38 pad 0.76)
  Top 0.254: JP13.6 70.13,63.25 71.48,61.9 73.7,61.9 C12.1
  other vias: 92.2,70.87 83.74,68.68 75.39,69.29 96.27,70.87
  pour Top (isolate 0.305): 67.06,61.98 67.06,111.51 69.6,114.05 122.94,114.05 124.21,112.78 124.21,101.35 126.75,98.81 126.75,65.79 124.21,63.25 124.21,60.71 68.33,60.71
  pour Bottom (isolate 0.305): 67.06,61.98 67.06,111.51 69.6,114.05 122.94,114.05 124.21,112.78 124.21,101.35 126.75,98.81 126.75,65.79 124.21,63.25 124.21,60.71 68.33,60.71
MISO  (via drill 0.38)
  Top 0.254: ATMEGA328P-AU.16 18.03,21.95 16.56,23.42 16.56,34.37 v16.13,34.8 16.13,48.13 19.18,51.18 28.41,51.18 R12.1
  Bottom 0.254: J1.1 v16.13,34.8
MISO1  (via drill 0.38)
  Top 0.254: ATMEGA328P-AU1.16 78.23,21.95 76.76,23.42 76.76,34.37 v76.33,34.8 76.33,48.13 79.38,51.18 88.61,51.18 R27.1
  Bottom 0.254: J2.1 v76.33,34.8
MISO2  (via drill 0.38)
  Top 0.254: ATMEGA328P-AU2.16 18.03,75.8 16.56,77.27 16.56,88.21 v16.13,88.65 16.13,101.98 19.18,105.03 28.41,105.03 R42.1
  Bottom 0.254: J3.1 v16.13,88.65
MISO3  (via drill 0.38)
  Top 0.254: ATMEGA328P-AU3.16 78.23,75.8 76.76,77.27 76.76,88.21 v76.33,88.65 76.33,101.98 79.38,105.03 88.61,105.03 R57.1
  Bottom 0.254: J4.1 v76.33,88.65
MOSI  (via drill 0.38)
  Top 0.254: ATMEGA328P-AU.15 18.83,22.02 17.35,23.5 17.35,33.5 v17.37,33.53 17.37,48.49 19.56,50.67 30.16,50.67 R11.1
  Bottom 0.254: J1.4 11.94,33.53 v17.37,33.53
MOSI1  (via drill 0.38)
  Top 0.254: ATMEGA328P-AU1.15 79.03,22.02 77.55,23.5 77.55,33.5 v77.57,33.53 77.57,48.49 79.76,50.67 90.36,50.67 R26.1
  Bottom 0.254: J2.4 72.14,33.53 v77.57,33.53
MOSI2  (via drill 0.38)
  Top 0.254: ATMEGA328P-AU2.15 18.83,75.86 17.35,77.34 17.35,87.35 v17.37,87.38 17.37,102.34 19.56,104.52 30.16,104.52 R41.1
  Bottom 0.254: J3.4 11.94,87.38 v17.37,87.38
MOSI3  (via drill 0.38)
  Top 0.254: ATMEGA328P-AU3.15 79.03,75.86 77.55,77.34 77.55,87.35 v77.57,87.38 77.57,102.34 79.76,104.52 90.36,104.52 R56.1
  Bottom 0.254: J4.4 72.14,87.38 v77.57,87.38
N$1
  Top 0.254: ATMEGA328P-AU.20 15.65,16.15 15.34,16.46 14.55,16.46 14.38,16.28 14.38,11.73 15.37,10.74 15.37,7.96 C4.2
N$2
  Top 0.254: U1.D13 R13.2
N$3
  Top 0.254: U1.D12 29.39,57.33 29.39,53.86 R12.2
N$4
  Top 0.254: R11.2 31.6,57 U1.D11
N$5
  Top 0.254: JP4.2 40.62,53.59 39.09,55.12 34.21,55.12 33.81,54.71 R10.2
N$6
  Top 0.254: U1.D10 36.68,55.78 41.38,55.78 41.94,55.22 41.94,54.67 JP4.1
N$7
  Top 0.254: U1.D8 40.82,57.66 42.85,55.63 44.25,55.63 44.63,55.24 44.63,54.44 JP3.1
N$8
  Top 0.254: JP5.1 68.33,23.24 68.56,23.47 70.27,23.47 C5.2
N$9
  Top 0.254: ATMEGA328P-AU1.20 75.85,16.15 75.54,16.46 74.75,16.46 74.57,16.28 74.57,11.73 75.56,10.74 75.56,7.96 C6.2
N$10
  Top 0.254: U$3.11 93.04,48.34 96.19,51.49 96.19,52.06 R17.1 96.19,52.13
N$11
  Top 0.254: U$1.11 32.84,48.34 35.99,51.49 35.99,52.06 R2.1 35.99,52.13
N$12
  Top 0.254: U$1.7 45.8,48.34 47.5,50.04 R3.1
N$13
  Top 0.254: JP1.1 8.13,23.24 8.36,23.47 10.07,23.47 C3.2
N$14
  Top 0.254: U$1.4 R4.1
N$15
  Top 0.254: R5.1 U$1.2
N$16
  Top 0.254: R6.1 U$1.1
N$17
  Top 0.254: U$1.10 34.8,49.1 35.94,50.24 37.39,50.24 38.15,51 38.15,52.11 R7.1
N$18
  Top 0.254: U$1.5 39.85,26.31 R8.1
N$19
  Top 0.254: R9.1 U$1.3
N$20
  Top 0.254: U$3.7 105.99,48.34 107.7,50.04 R18.1
N$21
  Top 0.254: U$3.4 R19.1
N$22
  Top 0.254: R20.1 U$3.2
N$23
  Top 0.254: R21.1 U$3.1
N$24
  Top 0.254: U$3.10 95,49.1 96.14,50.24 97.59,50.24 98.35,51 98.35,52.11 R22.1
N$25
  Top 0.254: U$3.5 100.05,26.31 R23.1
N$26
  Top 0.254: R24.1 U$3.3
N$27
  Top 0.254: U2.D13 R28.2
N$28
  Top 0.254: U2.D12 89.59,57.33 89.59,53.86 R27.2
N$29
  Top 0.254: R26.2 91.8,57 U2.D11
N$30
  Top 0.254: JP8.2 100.81,53.59 99.29,55.12 94.41,55.12 94,54.71 R25.2
N$31
  Top 0.254: U2.D10 96.88,55.78 101.58,55.78 102.13,55.22 102.13,54.67 JP8.1
N$32
  Top 0.254: U2.D8 101.02,57.66 103.05,55.63 104.44,55.63 104.83,55.24 104.83,54.44 JP7.1
N$33
  Top 0.254: JP9.1 8.13,77.09 8.36,77.32 10.07,77.32 C8.2
N$34
  Top 0.254: ATMEGA328P-AU2.20 15.65,70 15.34,70.31 14.55,70.31 14.38,70.13 14.38,65.58 15.37,64.59 15.37,61.81 C9.2
N$35
  Top 0.254: U$6.11 32.84,102.18 35.99,105.33 35.99,105.91 R32.1 35.99,105.98
N$36
  Top 0.254: U$6.7 45.8,102.18 47.5,103.89 R33.1
N$37
  Top 0.254: U$6.4 R34.1
N$38
  Top 0.254: R35.1 U$6.2
N$39
  Top 0.254: R36.1 U$6.1
N$40
  Top 0.254: U$6.10 34.8,102.95 35.94,104.09 37.39,104.09 38.15,104.85 38.15,105.96 R37.1
N$41
  Top 0.254: U$6.5 39.85,80.16 R38.1
N$42
  Top 0.254: R39.1 U$6.3
N$43
  Top 0.254: U3.D13 R43.2
N$44
  Top 0.254: U3.D12 29.39,111.18 29.39,107.71 R42.2
N$45
  Top 0.254: R41.2 31.6,110.85 U3.D11
N$46
  Top 0.254: JP12.2 40.62,107.44 39.09,108.97 34.21,108.97 33.81,108.56 R40.2
N$47
  Top 0.254: U3.D10 36.68,109.63 41.38,109.63 41.94,109.07 41.94,108.51 JP12.1
N$48
  Top 0.254: U3.D8 40.82,111.51 42.85,109.47 44.25,109.47 44.63,109.09 44.63,108.29 JP11.1
N$49
  Top 0.254: JP13.1 68.33,77.09 68.56,77.32 70.27,77.32 C11.2
N$50
  Top 0.254: ATMEGA328P-AU3.20 75.85,70 75.54,70.31 74.75,70.31 74.57,70.13 74.57,65.58 75.56,64.59 75.56,61.81 C12.2
N$51
  Top 0.254: U$8.11 93.04,102.18 96.19,105.33 96.19,105.91 R47.1 96.19,105.98
N$52
  Top 0.254: U$8.7 105.99,102.18 107.7,103.89 R48.1
N$53
  Top 0.254: U$8.4 R49.1
N$54
  Top 0.254: R50.1 U$8.2
N$55
  Top 0.254: R51.1 U$8.1
N$56
  Top 0.254: U$8.10 95,102.95 96.14,104.09 97.59,104.09 98.35,104.85 98.35,105.96 R52.1
N$57
  Top 0.254: U$8.5 100.05,80.16 R53.1
N$58
  Top 0.254: R54.1 U$8.3
N$59
  Top 0.254: U4.D13 R58.2
N$60
  Top 0.254: U4.D12 89.59,111.18 89.59,107.71 R57.2
N$61
  Top 0.254: R56.2 91.8,110.85 U4.D11
N$62
  Top 0.254: JP16.2 100.81,107.44 99.29,108.97 94.41,108.97 94,108.56 R55.2
N$63
  Top 0.254: U4.D10 96.88,109.63 101.58,109.63 102.13,109.07 102.13,108.51 JP16.1
N$64
  Top 0.254: U4.D8 101.02,111.51 103.05,109.47 104.44,109.47 104.83,109.09 104.83,108.29 JP15.1
RESET  (via drill 0.38)
  Top 0.254: v13.84,10.92 13.87,10.95 13.87,14.07 13.51,14.43 13.51,21.79 13.21,22.1 13.21,23.48 R1.1 | ATMEGA328P-AU.29 21.23,10.75 v21.95,10.03 | C3.1 R1.1 | R1.1 13.22,29.7 J1.5
  Bottom 0.305: v13.84,10.92 14.73,10.03 v21.95,10.03
RESET1  (via drill 0.38)
  Top 0.254: v74.04,10.92 74.07,10.95 74.07,14.07 73.71,14.43 73.71,21.79 73.41,22.1 73.41,23.48 R16.1 | ATMEGA328P-AU1.29 81.43,10.75 v82.14,10.03 | C5.1 R16.1 | R16.1 73.42,29.7 J2.5
  Bottom 0.305: v74.04,10.92 74.93,10.03 v82.14,10.03
RESET2  (via drill 0.38)
  Top 0.254: v13.84,64.77 13.87,64.8 13.87,67.92 13.51,68.28 13.51,75.64 13.21,75.95 13.21,77.33 R31.1 | ATMEGA328P-AU2.29 21.23,64.6 v21.95,63.88 | C8.1 R31.1 | R31.1 13.22,83.55 J3.5
  Bottom 0.305: v13.84,64.77 14.73,63.88 v21.95,63.88
RESET3  (via drill 0.38)
  Top 0.254: v74.04,64.77 74.07,64.8 74.07,67.92 73.71,68.28 73.71,75.64 73.41,75.95 73.41,77.33 R46.1 | ATMEGA328P-AU3.29 81.43,64.6 v82.14,63.88 | C11.1 R46.1 | R46.1 73.42,83.55 J4.5
  Bottom 0.305: v74.04,64.77 74.93,63.88 v82.14,63.88
RX  (via drill 0.38)
  Top 0.254: JP2.1 v61.47,28.45 | ATMEGA328P-AU.30 22.03,12.52 21.13,13.41 21.13,17.35 v20.93,17.55 | JP2.1 61.42,52.58 | JP3.2 45.97,53.59 46.23,53.85 46.23,54.66 46.84,55.27 58.78,55.27 JP2.1
  Bottom 0.254: 23.37,24.64 57.66,24.64 v61.47,28.45 | 11.81,16.38 11.18,17.02 JP1.3
  Bottom 0.305: 23.37,24.64 22.1,24.64 20.83,23.37 20.83,17.65 v20.93,17.55 19.76,16.38 11.81,16.38
RX1  (via drill 0.38)
  Top 0.254: JP6.1 v121.67,28.45 | ATMEGA328P-AU1.30 82.23,12.52 81.33,13.41 81.33,17.35 v81.13,17.55 | JP6.1 121.61,52.58 | JP7.2 106.17,53.59 106.43,53.85 106.43,54.66 107.04,55.27 118.97,55.27 JP6.1
  Bottom 0.254: 83.57,24.64 117.86,24.64 v121.67,28.45 | 72.01,16.38 71.37,17.02 JP5.3
  Bottom 0.305: 83.57,24.64 82.3,24.64 81.03,23.37 81.03,17.65 v81.13,17.55 79.96,16.38 72.01,16.38
RX2  (via drill 0.38)
  Top 0.254: JP10.1 v61.47,82.3 | ATMEGA328P-AU2.30 22.03,66.36 21.13,67.26 21.13,71.2 v20.93,71.4 | JP10.1 61.42,106.43 | JP11.2 45.97,107.44 46.23,107.7 46.23,108.51 46.84,109.12 58.78,109.12 JP10.1
  Bottom 0.254: 23.37,78.49 57.66,78.49 v61.47,82.3 | 11.81,70.23 11.18,70.87 JP9.3
  Bottom 0.305: 23.37,78.49 22.1,78.49 20.83,77.22 20.83,71.5 v20.93,71.4 19.76,70.23 11.81,70.23
RX3  (via drill 0.38)
  Top 0.254: JP14.1 v121.67,82.3 | ATMEGA328P-AU3.30 82.23,66.36 81.33,67.26 81.33,71.2 v81.13,71.4 | JP14.1 121.61,106.43 | JP15.2 106.17,107.44 106.43,107.7 106.43,108.51 107.04,109.12 118.97,109.12 JP14.1
  Bottom 0.254: 83.57,78.49 117.86,78.49 v121.67,82.3 | 72.01,70.23 71.37,70.87 JP13.3
  Bottom 0.305: 83.57,78.49 82.3,78.49 81.03,77.22 81.03,71.5 v81.13,71.4 79.96,70.23 72.01,70.23
SCK  (via drill 0.38)
  Top 0.254: v15.24,32.26 15.24,48.01 19.18,51.94 27.04,51.94 R13.1 | ATMEGA328P-AU.17 15.72,18.55 15.49,18.77 15.49,22.38 15.52,22.38 16.05,22.91 16.05,31.45 v15.24,32.26 | 15.39,32.11 v15.24,32.26 | 15.85,31.65 v15.24,32.26
  Bottom 0.254: J1.3 v15.24,32.26
SCK1  (via drill 0.38)
  Top 0.254: v75.44,32.26 75.44,48.01 79.38,51.94 87.23,51.94 R28.1 | ATMEGA328P-AU1.17 75.92,18.55 75.69,18.77 75.69,22.38 75.72,22.38 76.25,22.91 76.25,31.45 v75.44,32.26 | 75.59,32.11 v75.44,32.26 | 76.05,31.65 v75.44,32.26
  Bottom 0.254: J2.3 v75.44,32.26
SCK2  (via drill 0.38)
  Top 0.254: v15.24,86.11 15.24,101.85 19.18,105.79 27.04,105.79 R43.1 | ATMEGA328P-AU2.17 15.72,72.4 15.49,72.62 15.49,76.22 15.52,76.22 16.05,76.76 16.05,85.29 v15.24,86.11 | 15.39,85.95 v15.24,86.11 | 15.85,85.5 v15.24,86.11
  Bottom 0.254: J3.3 v15.24,86.11
SCK3  (via drill 0.38)
  Top 0.254: v75.44,86.11 75.44,101.85 79.38,105.79 87.23,105.79 R58.1 | ATMEGA328P-AU3.17 75.92,72.4 75.69,72.62 75.69,76.22 75.72,76.22 76.25,76.76 76.25,85.29 v75.44,86.11 | 75.59,85.95 v75.44,86.11 | 76.05,85.5 v75.44,86.11
  Bottom 0.254: J4.3 v75.44,86.11
SCL
  Top 0.254: ATMEGA328P-AU.28 20.43,10.41 20.9,9.93 20.9,9.92 R15.1 22.99,7.91 59.98,7.91 U1.A5
SCL1
  Top 0.254: ATMEGA328P-AU1.28 80.63,10.41 81.1,9.93 81.1,9.92 R30.1 83.19,7.91 120.18,7.91 U2.A5
SCL2
  Top 0.254: ATMEGA328P-AU2.28 20.43,64.26 20.9,63.78 20.9,63.77 R45.1 22.99,61.76 59.98,61.76 U3.A5
SCL3
  Top 0.254: ATMEGA328P-AU3.28 80.63,64.26 81.1,63.78 81.1,63.77 R60.1 83.19,61.76 120.18,61.76 U4.A5
SDA  (via drill 0.38)
  Top 0.254: 57.66,10.67 U1.A4 | 57.66,10.67 57.63,10.67 57.28,11.02 | v20.22,12.9 19.63,12.31 ATMEGA328P-AU.27 19.63,10.64 17.53,8.53 17.53,8.01 R14.1 17.4,7.91 | v27.08,11.48 56.84,11.48 57.66,10.67
  Bottom 0.254: v20.22,12.9 20.73,12.39 26.16,12.39 v27.08,11.48
SDA1  (via drill 0.38)
  Top 0.254: 117.86,10.67 U2.A4 | 117.86,10.67 117.83,10.67 117.47,11.02 | v80.42,12.9 79.83,12.31 ATMEGA328P-AU1.27 79.83,10.64 77.72,8.53 77.72,8.01 R29.1 77.6,7.91 | v87.27,11.48 117.04,11.48 117.86,10.67
  Bottom 0.254: v80.42,12.9 80.92,12.39 86.36,12.39 v87.27,11.48
SDA2  (via drill 0.38)
  Top 0.254: 57.66,64.52 U3.A4 | 57.66,64.52 57.63,64.52 57.28,64.87 | v20.22,66.75 19.63,66.16 ATMEGA328P-AU2.27 19.63,64.48 17.53,62.38 17.53,61.86 R44.1 17.4,61.76 | v27.08,65.33 56.84,65.33 57.66,64.52
  Bottom 0.254: v20.22,66.75 20.73,66.24 26.16,66.24 v27.08,65.33
SDA3  (via drill 0.38)
  Top 0.254: 117.86,64.52 U4.A4 | 117.86,64.52 117.83,64.52 117.47,64.87 | v80.42,66.75 79.83,66.16 ATMEGA328P-AU3.27 79.83,64.48 77.72,62.38 77.72,61.86 R59.1 77.6,61.76 | v87.27,65.33 117.04,65.33 117.86,64.52
  Bottom 0.254: v80.42,66.75 80.92,66.24 86.36,66.24 v87.27,65.33
TX  (via drill 0.38)
  Top 0.254: v23.37,18.29 v27.18,22.1 | v58.93,23.37 JP2.2 | JP1.2 9.3,19.56 10.67,18.19 v10.67,15.24 | ATMEGA328P-AU.31 22.83,12.48 22.1,13.21 v22.1,14.86
  Bottom 0.254: v27.18,22.1 57.66,22.1 v58.93,23.37 | v23.37,18.29 23.37,16.13 v22.1,14.86 | v10.67,15.24 10.67,15.16 10.69,15.16 10.69,15.14 11.28,14.55 21.79,14.55 v22.1,14.86 | 21.95,14.71 v22.1,14.86
TX1  (via drill 0.38)
  Top 0.254: v83.57,18.29 v87.38,22.1 | v119.13,23.37 JP6.2 | JP5.2 69.49,19.56 70.87,18.19 v70.87,15.24 | ATMEGA328P-AU1.31 83.03,12.48 82.3,13.21 v82.3,14.86
  Bottom 0.254: v87.38,22.1 117.86,22.1 v119.13,23.37 | v83.57,18.29 83.57,16.13 v82.3,14.86 | v70.87,15.24 70.87,15.16 70.89,15.16 70.89,15.14 71.48,14.55 81.99,14.55 v82.3,14.86 | 82.14,14.71 v82.3,14.86
TX2  (via drill 0.38)
  Top 0.254: v23.37,72.14 v27.18,75.95 | v58.93,77.22 JP10.2 | JP9.2 9.3,73.41 10.67,72.03 v10.67,69.09 | ATMEGA328P-AU2.31 22.83,66.33 22.1,67.06 v22.1,68.71
  Bottom 0.254: v27.18,75.95 57.66,75.95 v58.93,77.22 | v23.37,72.14 23.37,69.98 v22.1,68.71 | v10.67,69.09 10.67,69.01 10.69,69.01 10.69,68.99 11.28,68.4 21.79,68.4 v22.1,68.71 | 21.95,68.56 v22.1,68.71
TX3  (via drill 0.38)
  Top 0.254: v83.57,72.14 v87.38,75.95 | v119.13,77.22 JP14.2 | JP13.2 69.49,73.41 70.87,72.03 v70.87,69.09 | ATMEGA328P-AU3.31 83.03,66.33 82.3,67.06 v82.3,68.71
  Bottom 0.254: v87.38,75.95 117.86,75.95 v119.13,77.22 | v83.57,72.14 83.57,69.98 v82.3,68.71 | v70.87,69.09 70.87,69.01 70.89,69.01 70.89,68.99 71.48,68.4 81.99,68.4 v82.3,68.71 | 82.14,68.56 v82.3,68.71
VCC  (via drill 0.38)
  Top 0.254: 26.34,17.02 25.19,17.02 ATMEGA328P-AU.6 23.52,16.94 21.69,18.77 18.59,18.77 17.6,17.78 16.57,17.78 ATMEGA328P-AU.18 15.35,17.75 v14.94,18.16 14.94,23.48 R1.2 14.91,25.27 14.22,25.96 v14.22,26.16 | 26.34,17.02 C1.1 30.14,15.75 v30.99,15.75 | J1.2 9.4,33.53 9.4,28.45 v10.67,27.18 | JP1.4 9.4,13.21 10.67,13.21 11.94,14.48 v11.94,18.16 | ATMEGA328P-AU.4 26.17,15.35 26.36,15.54 26.36,16.99 26.34,17.02 | 21.34,7.96 R15.2 21.22,7.9 20.19,7.9 | R14.2 20.19,7.9 | v20.09,9.04 20.09,8 20.19,7.9
  Bottom 0.254: v30.99,15.75 34.8,15.75 36.07,14.48 U1.5V 34.8,10.67 24.38,10.67 22.86,9.14 20.19,9.14 v20.09,9.04 | v14.94,18.16 v11.94,18.16 | v10.67,27.18 13.21,27.18 v14.22,26.16
VCC1  (via drill 0.38)
  Top 0.254: 86.54,17.02 85.39,17.02 ATMEGA328P-AU1.6 83.72,16.94 81.89,18.77 78.79,18.77 77.8,17.78 76.77,17.78 ATMEGA328P-AU1.18 75.55,17.75 v75.13,18.16 75.13,23.48 R16.2 75.11,23.51 75.11,25.27 74.42,25.96 v74.42,26.16 | 86.54,17.02 C2.1 90.34,15.75 v91.19,15.75 | J2.2 69.6,33.53 69.6,28.45 v70.87,27.18 | JP5.4 69.6,13.21 70.87,13.21 72.14,14.48 v72.14,18.16 | ATMEGA328P-AU1.4 86.37,15.35 86.56,15.54 86.56,16.99 86.54,17.02 | 81.53,7.96 R30.2 81.42,7.9 80.39,7.9 | R29.2 80.39,7.9 | v80.29,9.04 80.29,8 80.39,7.9
  Bottom 0.254: v91.19,15.75 95,15.75 96.27,14.48 U2.5V 95,10.67 84.58,10.67 83.06,9.14 80.39,9.14 v80.29,9.04 | v75.13,18.16 v72.14,18.16 | v70.87,27.18 73.41,27.18 v74.42,26.16
VCC2  (via drill 0.38)
  Top 0.254: 26.34,70.87 25.19,70.87 ATMEGA328P-AU2.6 23.52,70.79 21.69,72.62 18.59,72.62 17.6,71.63 16.57,71.63 ATMEGA328P-AU2.18 15.35,71.6 v14.94,72.01 14.94,77.33 R31.2 14.91,77.36 14.91,79.12 14.22,79.81 v14.22,80.01 | 26.34,70.87 C7.1 30.14,69.6 v30.99,69.6 | J3.2 9.4,87.38 9.4,82.3 v10.67,81.03 | JP9.4 9.4,67.06 10.67,67.06 11.94,68.33 v11.94,72.01 | ATMEGA328P-AU2.4 26.17,69.2 26.36,69.39 26.36,70.84 26.34,70.87 | 21.34,61.81 R45.2 21.22,61.75 20.19,61.75 | R44.2 20.19,61.75 | v20.09,62.89 20.09,61.85 20.19,61.75
  Bottom 0.254: v30.99,69.6 34.8,69.6 36.07,68.33 U3.5V 34.8,64.52 24.38,64.52 22.86,62.99 20.19,62.99 v20.09,62.89 | v14.94,72.01 v11.94,72.01 | v10.67,81.03 13.21,81.03 v14.22,80.01
VCC3  (via drill 0.38)
  Top 0.254: 86.54,70.87 85.39,70.87 ATMEGA328P-AU3.6 83.72,70.79 81.89,72.62 78.79,72.62 77.8,71.63 76.77,71.63 ATMEGA328P-AU3.18 75.55,71.6 v75.13,72.01 75.13,77.33 R46.2 75.11,77.36 75.11,79.12 74.42,79.81 v74.42,80.01 | 86.54,70.87 C10.1 90.34,69.6 v91.19,69.6 | J4.2 69.6,87.38 69.6,82.3 v70.87,81.03 | JP13.4 69.6,67.06 70.87,67.06 72.14,68.33 v72.14,72.01 | ATMEGA328P-AU3.4 86.37,69.2 86.56,69.39 86.56,70.84 86.54,70.87 | 81.53,61.81 R60.2 81.42,61.75 80.39,61.75 | R59.2 80.39,61.75 | v80.29,62.89 80.29,61.85 80.39,61.75
  Bottom 0.254: v91.19,69.6 95,69.6 96.27,68.33 U4.5V 95,64.52 84.58,64.52 83.06,62.99 80.39,62.99 v80.29,62.89 | v75.13,72.01 v72.14,72.01 | v70.87,81.03 73.41,81.03 v74.42,80.01

## Text on the board
Bottom: v11 | v11 | v11 | v11
Dimension: Route Out | Route Out | Route Out | Route Out | Route Out | Route Out | Route Out | Route Out | Route Out
tPlace: Blu | Blu | Ylw | Ylw | Wht | Wht | Grn | Grn | Color | Red | RX | Color | Red | RX | !CS | !CS | RST | RST | TX | TX | 7 Segment Shield | 7 Segment Shield | RX | RX | VCC | VCC | GND | GND | GND | GND | Blu | Blu | Ylw | Ylw | Wht | Wht | Grn | Grn | Color | Red | RX | Color | Red | RX | !CS | !CS | RST | RST | TX | TX | 7 Segment Shield | 7 Segment Shield | RX | RX | VCC | VCC | GND | GND | GND | GND